# EAGLE board rgbsaber_control_v1.6 (EAGLE 5.10)
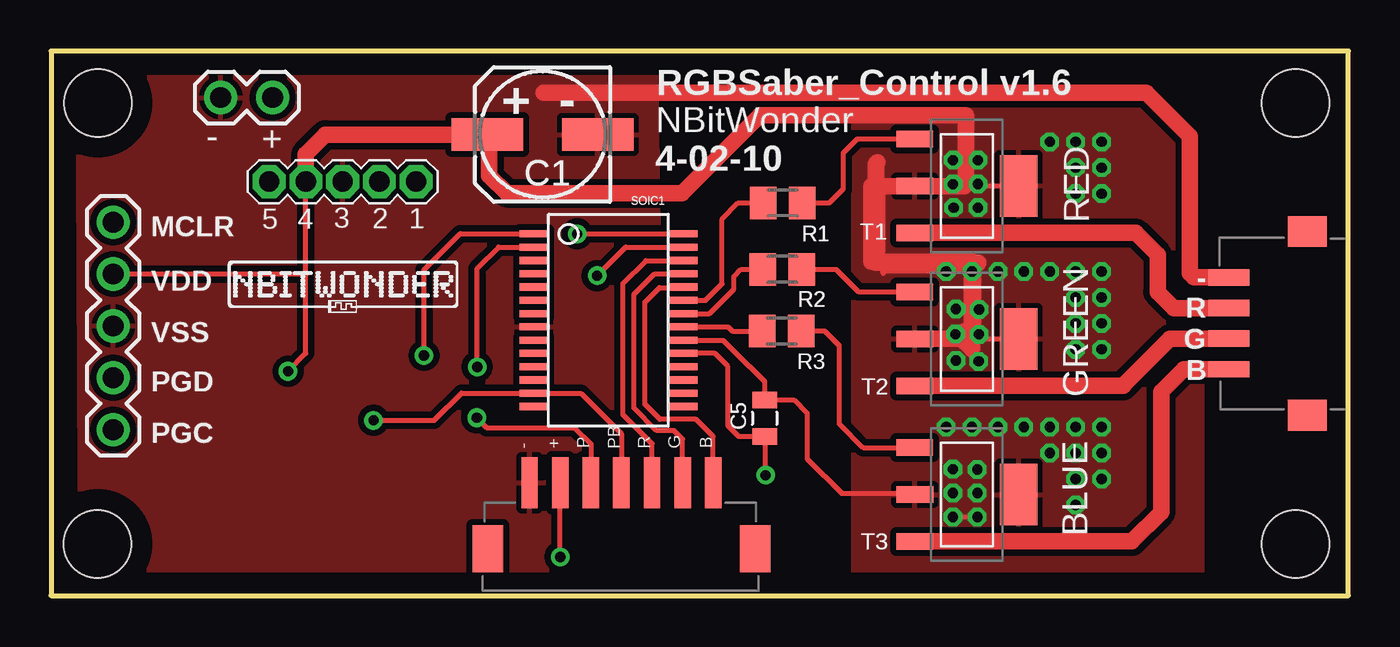
[diagram p0: board, top side]
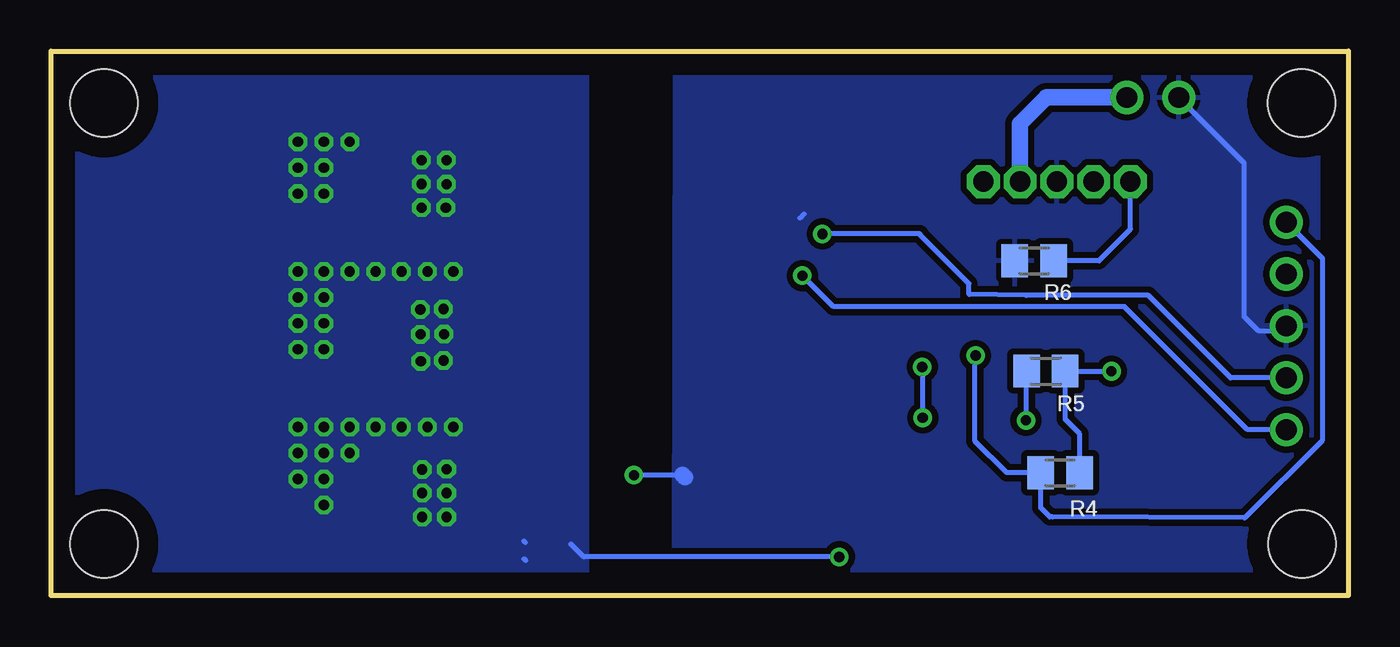
[diagram p1: board, bottom side, seen from below]

Size 63.55 x 26.67 mm. Coordinates in mm from the lower left corner, seen from the top.
Outline: 0,0 63.55,0 63.55,26.66 0,26.67 0,0
Copper layers (1*16): Top 0.035mm / dielectric 1.5mm / Bottom 0.035mm
Design rules "default *": minimum track width 10mil, minimum drill 24mil, track to track 8mil, track to pad 8mil, pad to pad 8mil, via to via 8mil, smd to smd 8mil, copper to edge 40mil, drill to drill 8mil, minimum pad ring 12mil, minimum via ring 8mil, stop-mask expansion 4mil, vias tented up to drill 20mil, thermal gap 10mil

## Footprints (pad centres in the part's own frame; a part is rotated, then mirrored left to right if it is on the bottom)
JST_ZH_SM4_SE_4 = smd 0.8 x 2: 1 -2.25,-1.5; 2 -0.75,-1.5; 3 0.75,-1.5; 4 2.25,-1.5 | smd 1.5 x 1.9: NC0 -4.5,2.35; NC1 4.5,2.35
1X02 = drill 1.016 round: 1 0,0; 2 2.54,0
153CLV-0605 = smd 3.5 x 1.6: + 2.7,0; - -2.7,0
0805 = smd 0.8 x 1.2: 1 -0.9,0; 2 0.9,0
JST_ZH_SM4_TE_7 = smd 0.8 x 2.5: 1 -4.5,-3; 2 -3,-3; 3 -1.5,-3; 4 0,-3; 5 1.5,-3; 6 3,-3; 7 4.5,-3 | smd 1.5 x 2.3: NC0 -6.55,0.25; NC1 6.55,0.25
1X05 = drill 1.016 round: 1 0,0; 2 2.54,0; 3 5.08,0; 4 7.62,0; 5 10.16,0
M0805 = smd 1.3 x 1.6: 1 -0.95,0; 2 0.95,0
1X05_2MM = drill 1 octagon: 1 0,0; 2 1.8,0; 3 3.6,0; 4 5.4,0; 5 7.2,0
SSOP-28 = smd 0.348 x 1.397: 1 -4.225,-3.656; 2 -3.575,-3.656; 3 -2.925,-3.656; 4 -2.275,-3.656; 5 -1.625,-3.656; 6 -0.975,-3.656; 7 -0.325,-3.656; 8 0.325,-3.656; 9 0.975,-3.656; 10 1.625,-3.656; 11 2.275,-3.656; 12 2.925,-3.656; 13 3.575,-3.656; 14 4.225,-3.656; 15 4.225,3.656; 16 3.575,3.656; 17 2.925,3.656; 18 2.275,3.656; 19 1.625,3.656; 20 0.975,3.656; 21 0.325,3.656; 22 -0.325,3.656; 23 -0.975,3.656; 24 -1.625,3.656; 25 -2.275,3.656; 26 -2.925,3.656; 27 -3.575,3.656; 28 -4.225,3.656
SOT223 = smd 0.8 x 1.8: BASE -2.3,-2.55; COLL 0,-2.54; EMIT 2.3,-2.55 | smd 3 x 1.85: HEAT 0,2.54
STAND-OFF = hole 3.302: 0,0

## Placement (x,y rotation side)
_JST_SMD_RA1  1X04  [JST_ZH_SM4_SE_4]  59.18,13.34 270 top
BATT  [1X02]  8.31,24.39 0 top
C1  [153CLV-0605]  24.08,22.58 180 top
C5  .01uF  [0805]  34.95,8.69 270 top
JST_SMD1  1X07_JST  [JST_ZH_SM4_TE_7]  27.94,2.54 180 top
PRG  [1X05]  3.05,18.29 270 top
R1  6.65K  [M0805]  35.84,19.23 0 top
R2  3.3K  [M0805]  35.81,15.98 0 top
R3  3.3K  [M0805]  35.79,12.96 0 top
R4  10K  [M0805]  14.12,6.02 180 bottom
R5  10K  [M0805]  14.82,11 180 bottom
R6  250  [M0805]  15.4,16.4 180 bottom
REG  REG  [1X05_2MM]  10.68,20.28 0 top
SOIC1  P18F2221SSOP  [SSOP-28]  27.3,13.49 270 top
T1  FZTA14V1  [SOT223]  44.86,20.07 270 top
T2  FZTA14V1  [SOT223]  44.86,12.57 270 top
T3  FZTA14V1  [SOT223]  44.86,4.95 270 top
U$1  [STAND-OFF]  2.29,2.54 0 top
U$2  [STAND-OFF]  2.29,24.13 0 top
U$3  [STAND-OFF]  60.96,24.13 0 top
U$4  [STAND-OFF]  60.96,2.54 0 top
U$5  NBW_LOGOSMALL  [NBW_LOGO]  8.31,13.36 0 top

## Library data of the parts
_JST_SMD_RA1 JST_SMD1 REG U$5 = NBitWonder
BATT C5 PRG U$1-U$4 = SparkFun
C1 = rcl
R1-R6 = resistor
SOIC1 T1-T3 = purduecer

## Nets
BLUE_IND: JST_SMD1.1 SOIC1.24
BLUE_LUX: _JST_SMD_RA1.4 T3.EMIT
GND: _JST_SMD_RA1.1 BATT.1 C1.- C5.2 JST_SMD1.7 PRG.3 R6.2 REG.3 SOIC1.8 SOIC1.19
GREEN_IND: JST_SMD1.2 SOIC1.25
GREEN_LUX: _JST_SMD_RA1.3 T2.EMIT
MCLR: PRG.1 R4.2 SOIC1.1
N$1: R6.1 REG.1
N$4: R1.1 SOIC1.23
N$5: R1.2 T1.BASE
N$6: R2.1 SOIC1.22
N$7: R2.2 T2.BASE
N$8: R3.1 SOIC1.21
N$9: R3.2 T3.BASE
PB0: JST_SMD1.4 R5.2 SOIC1.13
PGC: PRG.5 SOIC1.27
PGD: PRG.4 SOIC1.28
POT: JST_SMD1.5 SOIC1.2
PWR: BATT.2 REG.4
RED_IND: JST_SMD1.3 SOIC1.26
RED_LUX: _JST_SMD_RA1.2 T1.EMIT
VCC: C1.+ C5.1 JST_SMD1.6 PRG.2 R4.1 R5.1 REG.2 SOIC1.20 T1.COLL T1.HEAT T2.COLL T2.HEAT T3.COLL T3.HEAT

## Tracks (layer width: path | path; a pad name or v marks a point on that pad's centre or on a via)
BLUE_IND
  Top 0.254: SOIC1.24 30.94,15.09 29.79,15.09 29.08,14.38 29.08,9.37 29.82,8.64 31.59,8.64 32.43,7.8 JST_SMD1.1
BLUE_LUX
  Top 0.813: T3.EMIT 52.95,2.65 54.38,4.09 54.38,9.98 55.49,11.09 _JST_SMD_RA1.4
GND  (via drill 0.5)
  Top 0.254: C5.2 | SOIC1.19 32.51,11.86 33.15,11.23 33.15,8.33 33.69,7.79 C5.2 | v35,5.9 | v35,5.9 35,7.74 C5.2
  Top 0.813: 24.13,24.64 53.65,24.64 55.78,22.51 55.78,16.64 55.78,15.78 55.98,15.59 _JST_SMD_RA1.1
  Bottom 0.254: PRG.3 3.31,12.95 4.39,12.95 5.11,13.67 5.11,21.18 BATT.1 | 26.67,18.69 26.87,18.49 | v35,5.9 32.62,5.9 32.61,5.91
  Bottom 0.813: REG.3 | 32.61,5.91 32.5,5.8
  pour Bottom (isolate 0.305): 33.02,0.61 32.97,25.99 1.47,25.93 1.57,0.59
  pour Top (isolate 0.305): 30.02,0.61 29.64,25.86 1.3,25.81 1.43,0.67
GREEN_IND
  Top 0.254: SOIC1.25 29.56,15.76 28.55,14.75 28.55,9.2 29.67,8.08 30.52,8.08 30.94,7.66 JST_SMD1.2 | SOIC1.25
GREEN_LUX
  Top 0.813: T2.EMIT 52.51,10.27 52.51,10.29 54.81,12.59 _JST_SMD_RA1.3
MCLR  (via drill 0.5)
  Top 0.254: v18.26,11.76 18.26,15.95 20.04,17.73 23.63,17.73 SOIC1.1
  Bottom 0.254: v18.26,11.76 18.29,11.74 18.29,7.57 16.74,6.02 R4.2 15.07,4.3 14.63,3.86 14.5,3.86 5.08,3.81 1.27,7.62 1.27,16.51 PRG.1
N$1
  Bottom 0.254: R6.1 12.22,16.4 10.68,17.94 REG.1
N$4
  Top 0.254: R1.1 33.66,19.23 32.87,18.44 32.87,15.27 32.06,14.46 SOIC1.23
N$5
  Top 0.254: R1.2 38.12,19.23 38.81,19.92 38.81,21.69 39.49,22.37 T1.BASE
N$6
  Top 0.254: SOIC1.22 32.25,13.81 33.45,15.01 33.45,15.62 33.81,15.98 R2.1
N$7
  Top 0.254: 42.29,14.86 T2.BASE 42.3,14.88 39.55,14.88 38.46,15.98 R2.2
N$8
  Top 0.254: SOIC1.21 33.17,13.16 33.38,12.96 R3.1
N$9
  Top 0.254: T3.BASE 39.77,7.25 38.61,8.41 38.61,12.24 37.9,12.95 R3.2
PB0  (via drill 0.5)
  Top 0.254: v15.8,8.59 18.77,8.59 20.1,9.91 SOIC1.13 25.96,9.91 27.94,7.93 JST_SMD1.4
  Bottom 0.254: R5.2 15.77,8.61 v15.8,8.59
PGC  (via drill 0.5)
  Top 0.254: v26.75,15.67 28.14,17.07 SOIC1.27
  Bottom 0.254: v26.75,15.67 25.22,14.15 10.97,14.15 4.95,8.13 PRG.5
PGD  (via drill 0.5)
  Top 0.254: v25.77,17.72 SOIC1.28
  Bottom 0.254: v25.77,17.72 20.99,17.72 20.98,17.71 20.98,17.68 18.58,15.28 18.58,14.75 15.8,14.7 9.8,14.7 5.77,10.67 PRG.4
POT  (via drill 0.5)
  Top 0.254: v20.88,11.2 20.88,16.03 21.92,17.07 SOIC1.2 | v20.85,8.71 21.34,8.23 25.65,8.23 26.44,7.45 JST_SMD1.5
  Bottom 0.254: v20.88,11.2 20.85,11.18 v20.85,8.71
PWR
  Top 0.813: REG.4
  Bottom 0.813: REG.4 16.1,20.3 16.1,23.1 14.8,24.4 BATT.2
RED_IND
  Top 0.254: SOIC1.26 29.13,16.41 28,15.28 28.02,15.26 28.02,8.87 29.44,7.44 JST_SMD1.3
RED_LUX
  Top 0.813: T1.EMIT 53.12,17.77 54.2,16.69 54.2,14.87 54.99,14.08 _JST_SMD_RA1.2
VCC  (via drill 0.5)
  Top 0.254: 44.87,12.57 T2.COLL 43.08,12.57 | 44.87,12.57 T2.HEAT | T1.HEAT T1.COLL 40.77,20.06 40.77,18.51 40.76,18.51 40.76,15.78 40.85,15.88 v43.84,15.88 v45.11,15.88 v45.46,14.01 v45.45,12.8 44.87,12.57 | T3.COLL 42.3,4.97 | v45.37,3.85 v44.18,3.85 | T3.COLL 42.3,4.97 | T3.COLL 42.27,5 38.73,5 37.03,6.71 37.03,8.94 36.39,9.59 C5.1 34.95,10.49 34.21,11.23 34.19,11.23 32.92,12.5 30.98,12.5 SOIC1.20 | v24.94,1.9 JST_SMD1.6 | 12.48,15.71 12.48,11.86 v11.61,10.99 | 12.48,15.71 REG.2 | PRG.2 12.44,15.75 12.48,15.71
  Top 0.813: 40.49,21.24 40.41,21.16 40.41,16.31 45.41,16.31 45.11,16 v45.11,15.88 45.11,12.07 44.6,12.57 T2.COLL 44.73,12.57 44.73,12.96 45.16,12.96 45.16,16.36 40.18,16.36 40.18,20.04 44.73,20.04 44.73,20.27 44.81,20.27 44.81,23.52 34.72,23.52 30.91,19.71 22.33,19.71 21.46,20.58 21.46,22.5 C1.+ 13.44,22.58 12.48,21.63 REG.2
  Bottom 0.254: R4.1 13.13,6.02 13.16,6 13.16,7.93 13.87,8.64 R5.1 v11.61,10.99 | 40.32,2.61 40.39,2.68 | 40.29,1.71 40.39,1.8 | v24.94,1.9 37.46,1.9 38.1,2.54
  other vias: 44.18,21.33 45.4,21.33 45.4,20.16 44.21,19 45.4,19 48.92,22.23 50.19,22.23 51.46,22.23 50.19,20.96 51.46,20.96 51.46,19.69 50.19,19.69 46.38,15.88 44.32,14.04 44.3,12.81 44.32,11.52 45.44,11.48 47.65,15.88 48.92,15.88 50.19,15.88 51.46,15.88 50.19,14.61 51.46,14.61 50.19,13.34 51.46,13.34 50.19,12.07 51.46,12.07 51.46,8.26 51.46,6.99 51.46,5.72 50.19,4.45 50.19,5.72 50.19,6.99 50.19,8.26 48.92,8.26 48.92,6.99 47.65,8.26 46.38,8.26 45.11,8.26 43.84,8.26 44.18,6.19 45.37,6.18 45.37,5.03 44.18,5.03 45.4,20.16 44.18,20.15
  pour Top (isolate 0.305): 39.32,0.86 39.32,25.68 56.36,25.68 56.36,0.76 39.29,0.76 39.29,0.99
  pour Bottom (isolate 0.305): 37.8,0.69 62.59,0.74 62.59,25.86 37.31,25.93 37.31,0.69

## Text on the board
tPlace: RGBSaber_Control v1.6 | + | - | NBitWonder | - | + | 4-02-10 | MCLR | 5 | 4 | 3 | 2 | 1 | RED | - | VDD | R | G | VSS | B | PGD | GREEN | PGC | - | + | P | PB | R | G | B | BLUE
_tNames: C1 | C1 | SOIC1 | SOIC1 | T1 | T1 | R1 | R1 | R2 | R2 | R3 | R3 | T2 | T2 | C5 | C5 | T3 | T3
_bNames: R6 | R6 | R5 | R5 | R4 | R4